# Altium PCB PCB1.PcbDoc
Units mil, origin at the board's own origin, x right, y up, seen from the top; angles counter-clockwise.
Board outline 8725 x 6365 mil, 2 copper layers (Top Layer, Bottom Layer); 35 components, 52 nets, 174 pads, 4 vias.
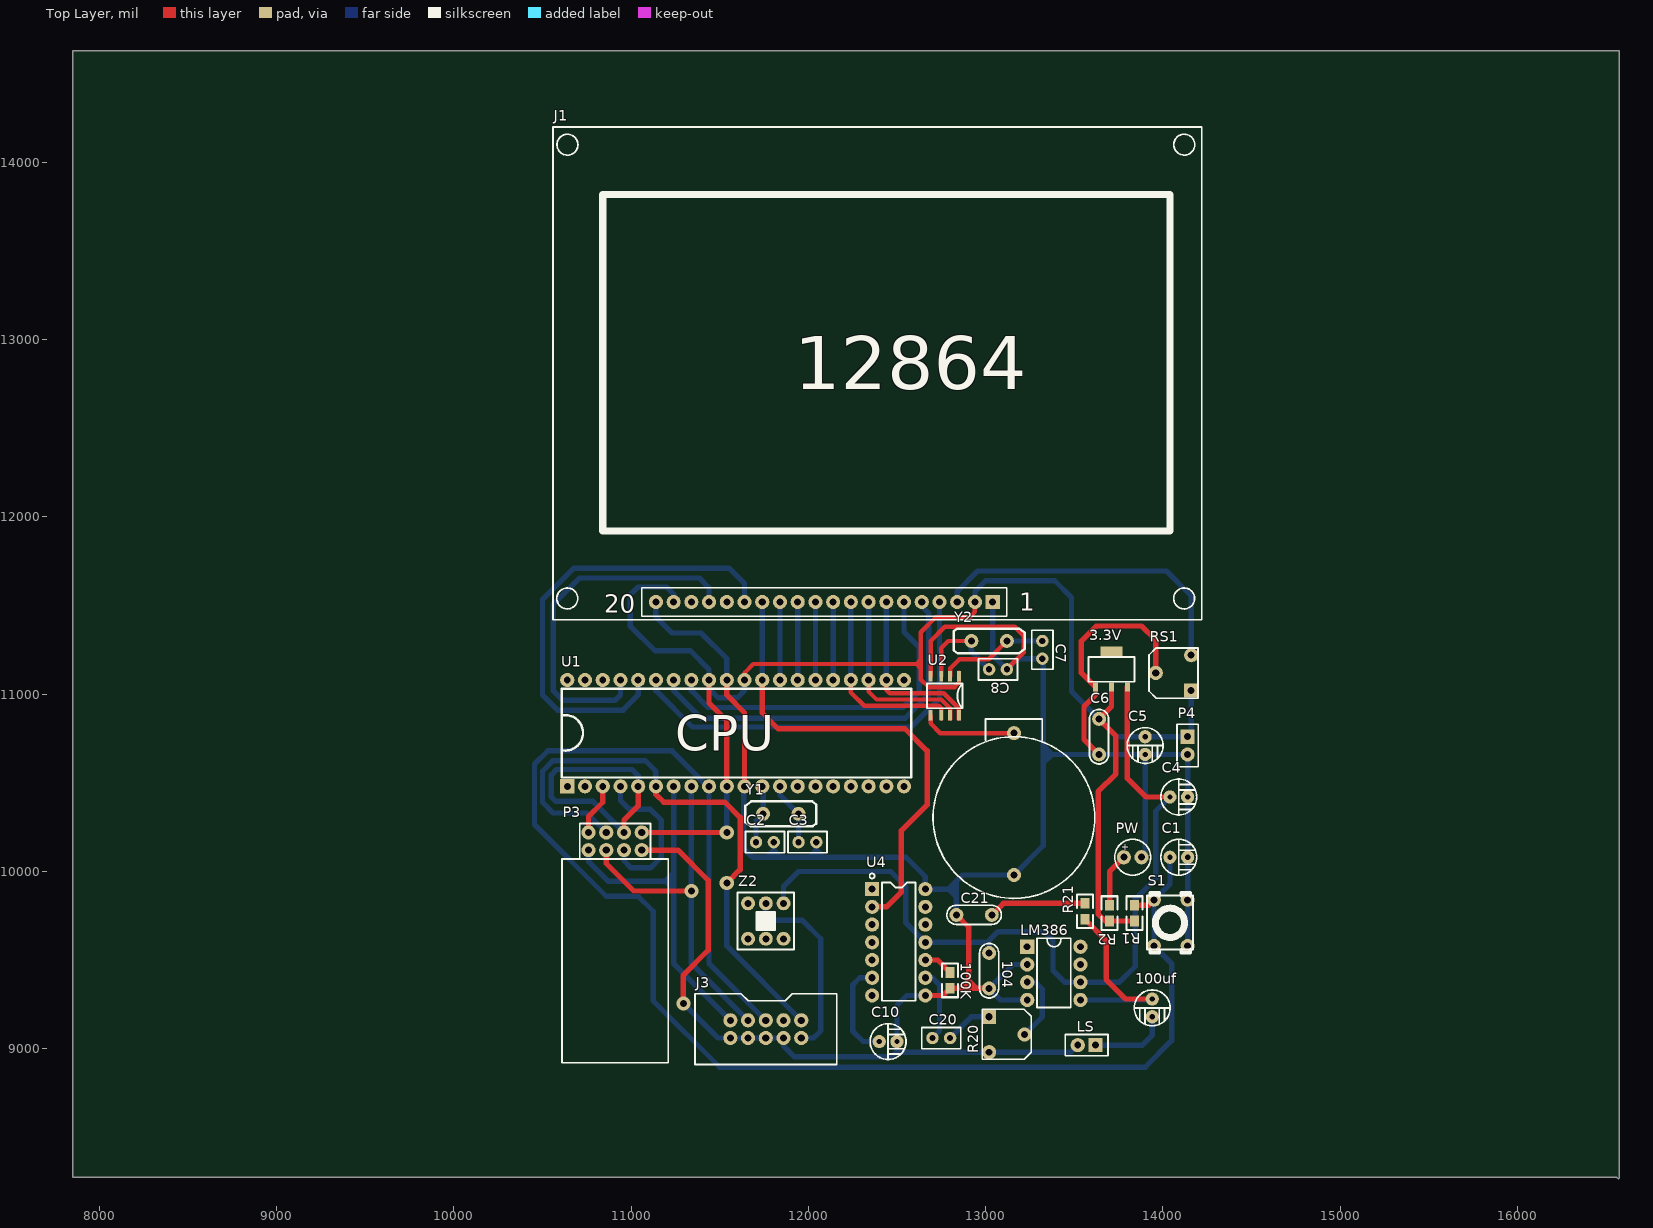
[diagram p0: Top Layer view]
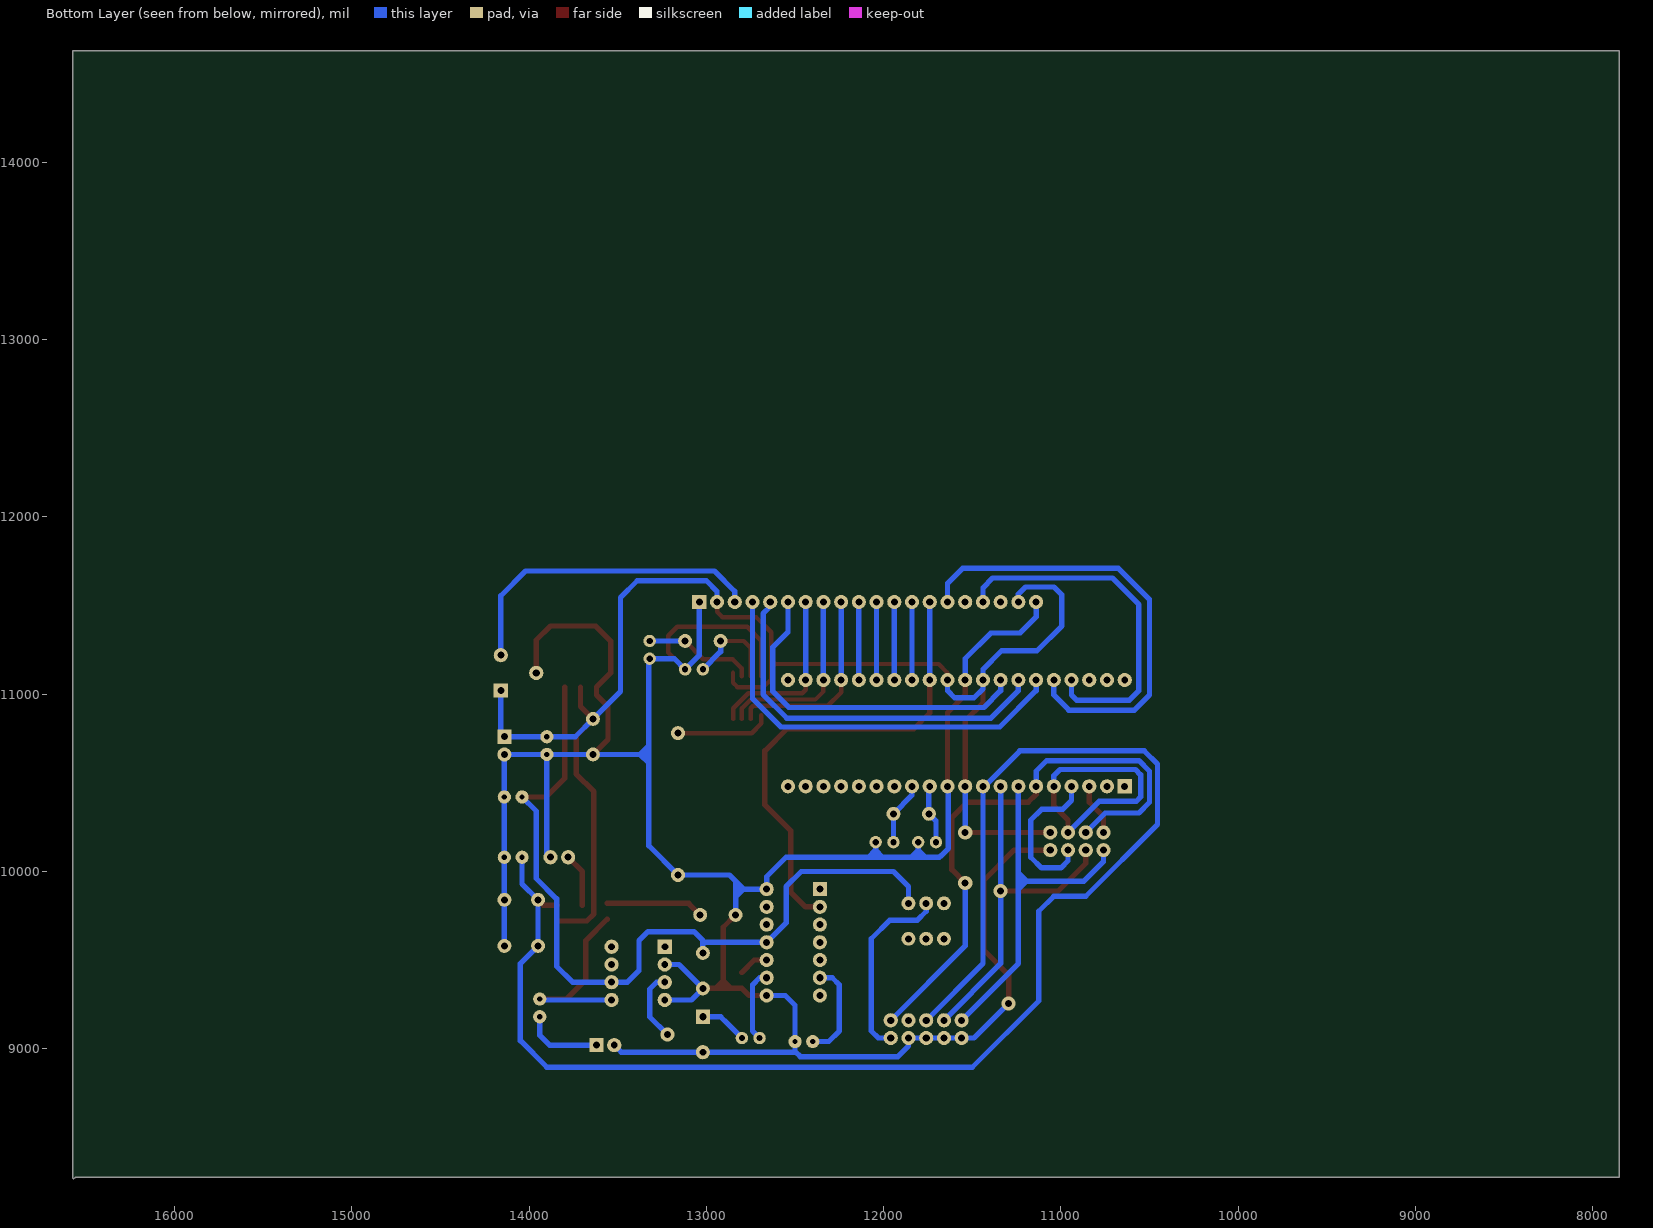
[diagram p1: Bottom Layer view, seen from below]

## Layer stack, top to bottom
Top Solder: solder mask 0.4, Solder Resist, Dk 3.5
Top Layer: signal copper 1.4
Dielectric1: dielectric 12.6, FR-4, Dk 4.8
Bottom Layer: signal copper 1.4
Bottom Solder: solder mask 0.4, Solder Resist, Dk 3.5

## Board outline
7850,14630 16575,14630 16575,8270 16570,8265 16560,8275 7850,8275 7850,14630

## Design rules (kind name [scope] priority, off if disabled: settings)
Clearance [All] p1: gap=10
PolygonConnect [All] p1: connectstyle=Relief reliefconductorwidth=10 reliefentries=4 polygonreliefangle="90 Angle" airgapwidth=10
RoutingVias [All] p1: holewidth=28 width=50 viastyle="Through Hole" minholewidth=28 minwidth=50 maxholewidth=28 maxwidth=50
SilkToSolderMaskClearance SilkscreenOverComponentPads [IsPad] p1: minsilkscreentomaskgap=10 clearancetoexposedcopper=TRUE
SolderMaskExpansion [All] p1: expansion=4
UnpouredPolygon [All] p1: allowunpoured=FALSE
Width [All] p1: maxlimit=30 minlimit=10 preferedwidth=30 minimp=50.000000 maximp=50.000000 favimp=50.000000
28 further rules are at their usual default settings.

## Components (designator, comment, footprint, x,y, rotation, side; value= is the part's Value field where it differs from the comment)
3.3V "ASM1117" "AMS1117-3.3V  SOT-223  贴片" 13620,11040 r0 top (schematic designator 1117_3.3V)
100K "Res1" 0805 12800,9340 r90 top (schematic designator R?)
100uf "" 电容 13940,9280 r270 top
104 "Cap" 电容涤纶223 13020,9340 r90 top (schematic designator C?)
C1 "" 电容 14040,10080 r0 top
C2 "" 电容22pF 11805,10165 r180 top
C3 "" 电容22pF 12045,10165 r180 top
C4 "" 电容 14040,10420 r0 top
C5 "" 电容 13900,10760 r270 top
C6 "Cap" 电容涤纶223 13640,10860 r270 top
C7 "Cap" 电容22pF 13320,11200 r90 top
C8 "Cap" 电容22pF 13120,11140 r180 top
C10 "Cap Pol1" 电容 12400,9040 r0 top
C20 "" 电容22pF 12700,9060 r0 top
C21 "" 电容CBB224(0.22) 12835,9755 r0 top
J1 "12864（排母）" 12864 13040,11520 r0 top
J3 "牛角座" 下载口（12345） 11960,9160 r180 top
LM386 "" "DIP 8" 13235,9575 r270 top
LS "喇叭8Ω" 2排针 13620,9020 r180 top (schematic designator LS?)
P3 "无线——排母" 无线模块 11060,10120 r180 top
P4 "Header 2" 2排针 14140,10760 r270 top
PW "" LED 13780,10080 r0 top
R1 "" 0805 13840,9720 r90 top
R2 "" 0805 13700,9720 r90 top
R20 "10K" 小电位器 13020,9180 r0 top
R21 "" 0805 13560,9820 r270 top
RS1 "" 小电位器 14160,11020 r180 top
S1 "" 4脚按键 13940,9580 r0 top
U1 "ATmega16" "DIP 40 单片机" 10640,10480 r0 top
U2 "DS1302（贴片）" SOP8（DS1302） 12860,10860 r270 top
U4 "ISD1820" 14脚IC 12360,9900 r270 top
Y1 "8M" 晶振 11945,10325 r180 top
Y2 "32.768" 晶振 12920,11300 r0 top
Z2 "电源开关" 自锁开关 11860,9820 r270 top
? "纽扣电池" 电池座 13160,10780 r90 top

## Footprints (in the part's own frame and the unit in brackets; to place one, negate y for a bottom-side part, rotate by r counter-clockwise, add the part's x,y. Pads: shape width x height; smd on the part's side, far side on the other; paste and mask are expansions set on the pad)
2排针 [mil]
  rect 80x80 hole 39.37: 1(0,0)
  round 80 hole 39.37: 2(100,0)
  silkscreen extent -70,-60 170,60
4脚按键 [mm]
  round 2 hole 1: 1(0.254,0) 1(0.254,6.604) 2(5.08,0) 2(5.08,6.604)
  silkscreen extent -0.76,-1.02 5.84,7.62
14脚IC [mil]
  rect 80x80 hole 40: 1(0,0)
  round 80 hole 40: 2(100,0) 3(200,0) 4(300,0) 5(400,0) 6(500,0) 7(600,0) 8(600,300) 9(500,300) 10(400,300) 11(300,300) 12(200,300) 13(100,300) 14(0,300)
  silkscreen extent -88,-14 630,245
0805 [mil]
  rect 60x50 smd: 1(0,0) 2(90,0)
  silkscreen extent -50,-45 140,45
12864 [mil]
  rect 80x80 hole 40: 1(0,0)
  round 80 hole 40: 2(-100,0) 3(-200,0) 4(-300,0) 5(-400,0) 6(-500,0) 7(-600,0) 8(-700,0) 9(-800,0) 10(-900,0) 11(-1000,0) 12(-1100,0) 13(-1200,0) 14(-1300,0) 15(-1400,0) 16(-1500,0) 17(-1600,0) 18(-1700,0) 19(-1800,0) 20(-1900,0)
  silkscreen extent -2480,-100 1180,2680
"AMS1117-3.3V  SOT-223  贴片" [mm]
  rect 0.7x1.3 smd: 1(0,0) 2(2.286,0) 3(4.572,0)
  rect 3.2x1.5 smd: ""(2.286,5.08)
  silkscreen extent -1.02,0.76 5.59,4.32
"DIP 8" [mil]
  rect 80x80 hole 39.37: 1(0,0)
  round 80 hole 39: 2(100,0) 3(200,0) 4(300,0) 5(300,300) 6(200,300) 7(100,300) 8(0,300)
  silkscreen extent -48,55 342,245
"DIP 40 单片机" [mil]
  rect 80x80 hole 39.37: 1(0,0)
  round 80 hole 39: 2(100,0) 3(200,0) 4(300,0) 5(400,0) 6(500,0) 7(600,0) 8(700,0) 9(800,0) 10(900,0) 11(1000,0) 12(1100,0) 13(1200,0) 14(1300,0) 15(1400,0) 16(1500,0) 17(1600,0) 18(1700,0) 19(1800,0) 20(1900,0) 21(1900,600) 22(1800,600) 23(1700,600) 24(1600,600) 25(1500,600) 26(1400,600) 27(1300,600) 28(1200,600) 29(1100,600) 30(1000,600) 31(900,600) 32(800,600) 33(700,600) 34(600,600) 35(500,600) 36(400,600) 37(300,600) 38(200,600) 39(100,600) 40(0,600)
  silkscreen extent -31,50 1940,550
LED [mil]
  round 80 hole 39.37: 1(0,0) 2(100,0)
  silkscreen extent -51,-101 151,101
SOP8（DS1302） [mil]
  rect 59.06x21.65 smd: 1(-240,-10) 2(-240,-60) 3(-240,-110) 4(-240,-170) 5(-20,-10) 6(-20,-60) 7(-20,-110) 8(-20,-170)
  silkscreen extent -200,-190 -60,10
下载口（12345） [mil]
  round 80 hole 40: 1(0,0) 2(100,0) 3(200,0) 4(300,0) 5(400,0) 6(0,100) 7(100,100) 8(200,100) 9(300,100) 10(400,100)
  silkscreen extent -200,-150 600,250
小电位器 [mil]
  rect 80x80 hole 40: 1(0,0)
  round 80 hole 40: 2(200,-100)
  round 80 hole 39: 3(0,-200)
  silkscreen extent -39,-240 238,43
无线模块 [mil]
  round 80 hole 40: 1(0,0) 2(0,-100) 3(100,0) 4(100,-100) 5(200,0) 6(200,-100) 7(300,0) 8(300,-100)
  silkscreen extent -150,-150 450,1200
晶振 [mm]
  round 2 hole 1: 1(0,0) 2(5.08,0)
  silkscreen extent -2.54,-1.78 7.62,1.78
电容 [mm]
  round 1.9 hole 0.762: 1(0,0) 2(2.54,0)
  silkscreen extent -1.3,-2.57 3.84,2.57
电容22pF [mil]
  round 70 hole 35: 1(0,0) 2(100,0)
  silkscreen extent -60,-60 160,60
电容CBB224(0.22) [mm]
  round 2 hole 1: 1(0,0) 2(5.08,0)
  silkscreen extent -1.37,-1.37 6.45,1.37
电容涤纶223 [mm]
  round 2 hole 1: 1(0,0) 2(5.08,0)
  silkscreen extent -1.37,-1.37 6.45,1.37
电池座 [mil]
  round 80 hole 39: 1(0,0) 2(-800,0)
  silkscreen extent -932,-456 80,456
自锁开关 [mm]
  round 2 hole 1: 1(0,-5.08) 2(0,-2.54) 3(0,0) 4(5.08,0) 5(5.08,-2.54) 6(5.08,-5.08)
  silkscreen extent -1.55,-6.6 6.6,1.5

## Part data
3.3V 100uf: library part Component_1
100K: "Resistor"
104 C6 C7 C8: "Capacitor"
C1 C4 C5: library part "Cap Pol3", "Polarized Capacitor (Surface Mount)"
C2 C3 C20 C21: library part Cap, "Capacitor"
C10: "Polarized Capacitor (Radial)"
J1: library part "Header 20", "Header, 20-Pin"
J3: library part "Header 5X2A", "Header, 5-Pin, Dual row"
LM386: library part LM386
LS: library part Speaker, "Loudspeaker"
P3: library part "Header 4X2", "Header, 4-Pin, Dual row"
P4: "Header, 2-Pin"
PW: library part LED0, "Typical INFRARED GaAs LED"
R1 R2 R21: library part Res2, "Resistor"
R20: library part "RPot SM", "Square Trimming Potentiometer"
RS1: library part RPot, "Potentiometer"
S1: library part SW-PB, "Switch"
U1: library part Component_2
U2: library part DS1302, "Trickle Charge Timekeeping Chip"
U4: library part ISD1810
Y1 Y2: library part XTAL, "Crystal Oscillator"
Z2: library part SW-SPDT, "SPDT Subminiature Toggle Switch, Right Angle Mounting, Vertical Actuation"
?: library part Meter, "Indicating Instrument"

## Via types
v1: diameter 80, hole 40, Top Layer to Bottom Layer, 4 vias

## Nets (pads, with @x,y where several pads share a name; then routed paths per layer and width w, separated by ;. In a path a pad name is that pad's centre, name@x,y a point inside that pad or via, vN(x,y) a via of type N, cw(c..) or ccw(c..) an arc to the next point about the centre after c; other vN are vias at no path point)
3.3V: 3.3V.2 C5.1 C6.1 J1.2 J1.19 P3.2 P4.1 R1.1 R2.1 RS1.1 U1.10 U1.30 U1.32 U2.1 | length 8756.2
  Top Layer w25: U1.30 11640,11120 11690,11170 12610,11170 ; U2.1@12850,11120 12850,11065 12825,11040 12677.83,11040 12635,11082.83 12635,11145 ; J1.2 12940,11465 12910,11435 12720,11435 12635,11350 12635,11195 ; 12610,11170 12635,11145 ; 12610,11170 12635,11195 ; 12635,11145 12635,11195
  Top Layer w30: P3.2 v1(11540,10220) ; U1.32 11440,10950 11540,10850 U1.10 ; 3.3V.2 13710,10930 C6.1 13735,10765 13735,10550 13635,10450 13635,9760 13675,9720 R2.1 R1.1
  Bottom Layer w30: J1.19@11220,11520 J1.19@11245,11495 ; J1.19 11240,11565 11200,11605 11040,11605 10995,11560 10995,11385 11135,11245 11335,11245 11440,11140 U1.32 11440,11030 11490,10980 11600,10980 11640,11020 U1.30 ; v1(11540,10220) U1.10 ; J1.2 12940,11580 13000,11640 13390,11640 13485,11545 13485,11015 C6.1 13740,10760 C5.1 P4.1 ; P4.1@14160,10780 RS1.1
CE: P3.3 U1.4 | length 877
  Bottom Layer w30: U1.4 10940,10400 10990,10350 11110,10350 11170,10290 11170,10080 11110,10020 11000,10020 10960,10060 P3.3
CSN: P3.4 U1.5 | length 1487.9
  Top Layer w30: P3.4 10960,10290 11040,10370 U1.5
  Bottom Layer w30: P3.4 10785,10395 10760,10395 10575,10395 10550,10420 10550,10545 10580,10575 11005,10575 11040,10540 U1.5
GND: 3.3V.1 100K.1 104.1 ?.2 C1.2 C2.1 C3.1 C4.2 C5.2 C6.2 C7.1 C8.1 C10.2 C21.1 J1.1 J1.20 J3.7 J3.8 J3.9 J3.10 LM386.2 LM386.4 LS.2 P3.1 P4.2 PW.2 R20.3 RS1.2 S1.2 U1.11 U1.31 U2.4 U4.8 U4.14 | length 16597.4
  Top Layer w25: U2.4 12690,11300 12770,11380 13165,11380 13215,11330 13215,11235 C8.1
  Top Layer w30: P3.1 11265,10120 11435,9950 11435,9555 11295,9415 v1(11295,9255) ; U1.31 11540,10995 11640,10895 U1.11 ; U4.8 12760,9300 100K.1 12860,9340 ; C21.1 12905,9685 12905,9385 ; 12955,9340 12950,9340 ; 104.1 12950,9340 ; C6.2 13555,10745 13555,10930 13620,10995 3.3V.1 13540,11120 13540,11300 13625,11385 13880,11385 13960,11305 RS1.2 ; 12860,9340 12905,9385 ; 12860,9340 12905,9340 ; 12905,9340 12950,9340 ; 12905,9340 12905,9385 ; 12905,9385 12950,9340
  Bottom Layer w30: J1.20 11140,11435 11230,11345 11395,11345 11540,11200 U1.31 ; v1(11295,9255) 11490,9060 J3.10 J3.9 J3.8 J3.7 11860,9015 11920,8955 12470,8955 12500,8985 ; U1.11@11635,10480 11635,10130 11680,10085 ; U1.11@11640,10455 U1.11 ; 11685,10080 11765,10080 ; C2.1 11805,10120 ; C3.1 12045,10120 ; U4.8 12555,9300 12500,9245 12500,8980 R20.3 13480,8980 LS.2 ; C21.1 12835,9855 ; J1.1 13040,11220 C8.1 ; C8.1@13125,11135 C8.1 ; LM386.4 13085,9275 104.1 13155,9475 LM386.2 ; PW.2 13900,10100 C5.2 ; S1.2@14140,9580 14140,9840 C1.2 C4.2 P4.2 C5.2 ; 11765,10080 11805,10080 ; 11765,10080 11805,10120 ; 11805,10080 11845,10080 ; 11805,10080 11805,10120 ; 11805,10120 11845,10080 ; 11845,10080 12005,10080 ; 12005,10080 12045,10080 ; 12005,10080 12045,10120 ; 12045,10080 12085,10080 ; 12045,10080 12045,10120 ; 12045,10120 12085,10080 ; 12085,10080 12550,10080 12660,9970 U4.14 12790,9900 ; 12790,9900 12835,9855 ; 12790,9900 12835,9900 ; 12790,9900 12835,9945 ; 12835,9855 12835,9900 ; 12835,9900 12835,9945 ; 12835,9945 12870,9980 ?.2 13325,10145 13325,10610 ; C8.1 13180,11200 13325,11200 13325,10710 ; 13325,10610 13325,10660 ; 13325,10610 13375,10660 ; 13325,10660 13375,10660 ; 13325,10660 13325,10710 ; 13325,10710 13375,10660 ; 13375,10660 C6.2 C5.2
IRQ: P3.8 U1.3 | length 293.1
  Top Layer w30: P3.8 10760,10310 10840,10390 U1.3
MISO: J3.5 P3.7 U1.7 | length 2170.4
  Bottom Layer w30: P3.7 10760,10055 10870,9945 11195,9945 ; U1.7 11240,9990 ; J3.5 11240,9480 11240,9900 ; 11195,9945 11240,9900 ; 11195,9945 11240,9945 ; 11195,9945 11240,9990 ; 11240,9900 11240,9945 ; 11240,9945 11240,9990
MOSI: J3.1 P3.6 U1.6 | length 3304
  Top Layer w30: U1.6 11140,10435 11185,10390 11530,10390 11615,10305 11615,10010 v1(11540,9935)
  Bottom Layer w30: P3.6 10750,10330 10560,10330 10500,10390 10500,10565 10560,10625 11080,10625 11140,10565 U1.6 ; v1(11540,9935) 11540,9580 J3.1
Net100uf_1: 100uf.1 LM386.5 R21.2 | length 1095.3
  Top Layer w30: R21.2 13680,9610 13680,9390 13790,9280 100uf.1
  Bottom Layer w30: LM386.5 100uf.1@13935,9275
Net100uf_2: 100uf.2 LS.1 | length 447.8
  Bottom Layer w30: LS.1 13885,9020 13902.5,9037.5 13940,9075 100uf.2
Net_1: ?.1 U2.8 | length 537.8
  Top Layer w25: U2.8 12690,10835 12745,10780 ?.1
NetC7_2: C7.2 U2.2 Y2.2 | length 629.2
  Top Layer w25: U2.2 12800,11145 12852.5,11197.5 13017.5,11197.5 Y2.2
  Bottom Layer w30: Y2.2 C7.2
NetC8_2: C8.2 U2.3 Y2.1 | length 548
  Top Layer w25: U2.3 12750,11260 12790,11300 Y2.1
  Bottom Layer w30: Y2.1 12920,11240 C8.2
NetC10_1: C10.1 U4.6 | length 561.4
  Bottom Layer w30: U4.6 12290,9400 12250,9360 12250,9100 12310,9040 C10.1
NetC20_1: C20.1 U4.9 | length 413.1
  Bottom Layer w30: U4.9 12700,9400 12740,9360 12740,9100 C20.1
NetC20_2: C20.2 R20.1 | length 269.7
  Bottom Layer w30: C20.2 12885,9145 12920,9180 R20.1
NetC21_2: C21.2 R21.1 | length 551.9
  Top Layer w30: C21.2 13100,9820 13170,9820 R21.1
NetJ3_6: J3.6 Z2.2 | length 1065.8
  Bottom Layer w30: Z2.2 11760,9775 11810,9725 11965,9725 12070,9620 12070,9100 12030,9060 J3.6
NetLM386_3: LM386.3 R20.2 | length 398
  Bottom Layer w30: R20.2 13320,9180 13320,9335 13280,9375 LM386.3
NetPW_1: PW.1 R2.2 | length 303.1
  Top Layer w30: R2.2 13700,10000 PW.1
NetR?_2: 100K.2 U4.10 | length 169
  Top Layer w30: U4.10 12730,9500 100K.2
PA0: U1.40
PA1: U1.39
PA2: U1.38
PA3: J1.17 U1.37 | length 2030.1
  Bottom Layer w30: U1.37 10940,10995 10910,10965 10615,10965 10560,11020 10560,11505 10710,11655 11385,11655 11440,11600 J1.17
PA4: J1.15 U1.36 | length 2588.1
  Bottom Layer w30: U1.36 11040,10995 10955,10910 10585,10910 10500,10995 10500,11535 10675,11710 11555,11710 11640,11625 J1.15
PA5: J1.4 U1.35 | length 2356.2
  Bottom Layer w30: U1.35 11140,11020 11345,10815 12580,10815 12740,10975 J1.4
PA6: J1.5 U1.34 | length 2157.6
  Bottom Layer w30: U1.34 11240,11020 11395,10865 12546.57,10865 12680,10998.43 12680,11455 12640,11495 J1.5
PA7: J1.6 U1.33 | length 1961.8
  Bottom Layer w30: U1.33 11340,11020 11435,10925 12535,10925 12625,11015 12625,11265 12540,11350 J1.6
PB0: U1.1
PB1: U1.2
PB7: J3.4 P3.5 U1.8 | length 2071.8
  Top Layer w30: P3.5 10860,10045 11015,9890 v1(11340,9890)
  Bottom Layer w30: U1.8 11340,9480 J3.4
PC0: J1.7 U1.22 U2.5 | length 1007.3
  Top Layer w25: U1.22 12440,11025 12460,11005 12763.99,11005 12848.49,10920.5 U2.5@12848.49,10860
  Bottom Layer w30: U1.22 J1.7
PC1: J1.8 U1.23 U2.6 | length 1063.8
  Top Layer w25: U1.23 12340,11015 12385,10970 12749.5,10970 12799.5,10920 U2.6@12799.5,10860
  Bottom Layer w30: U1.23 J1.8
PC2: J1.9 U1.24 U2.7 | length 1117.3
  Top Layer w25: U1.24 12240,11010 12315,10935 12735,10935 12750,10920 U2.7@12750,10860
  Bottom Layer w30: U1.24 J1.9
PC3: J1.10 U1.25 | length 440
  Bottom Layer w30: U1.25 J1.10
PC4: J1.11 U1.26 | length 440
  Bottom Layer w30: U1.26 J1.11
PC5: J1.12 U1.27 | length 440
  Bottom Layer w30: U1.27 J1.12
PC6: J1.13 U1.28 | length 440
  Bottom Layer w30: U1.28 J1.13
PC7: J1.14 U1.29 U4.2 | length 2699.3
  Top Layer w30: U1.29 11740,10970 11740,10895 11830,10805 12545,10805 12670,10680 12670,10375 12525,10230 12525,9885 12440,9800 U4.2
  Bottom Layer w30: U1.29 J1.14
PD0: U1.14
PD1: U1.15
PD2: U1.16
PD3: U1.17
PD4: U1.18
PD5: U1.19
PD6: U1.20
PD7: U1.21
RES: C1.1 J3.3 R1.2 S1.1 U1.9 | length 8648
  Top Layer w30: R1.2 13920,9810 S1.1@13950,9840
  Bottom Layer w30: J3.3 11440,9480 U1.9 11431.92,10480 11231.92,10680 10530,10680 10455,10605 10455,10265 10860,9860 11040,9860 11125,9775 11125,9270 11500,8895 13900,8895 14050,9045 14050,9480 13950,9580 13950,9840 14040,9930 C1.1
VCC: 3.3V.3 104.2 C4.1 LM386.6 U4.11 Z2.3 | length 4598.5
  Top Layer w30: 3.3V.3 13800,10525 13905,10420 C4.1
  Bottom Layer w30: Z2.3 11860,9915 11945,10000 12465,10000 12550,9915 12550,9710 U4.11 13020,9600 ; 104.2@13007.5,9552.5 104.2 13020,9600 ; C4.1 13960,10340 13960,9960 13845,9845 13845,9465 13755,9375 LM386.6 13445,9375 13380,9440 13380,9610 13330,9660 13070,9660 13020,9610 13020,9600
VO: J1.3 RS1.3 | length 1820.6
  Bottom Layer w30: J1.3 12840,11580 12955,11695 14020,11695 14160,11555 RS1.3
XTAL1: C3.2 U1.13 Y1.1 | length 358.5
  Bottom Layer w30: U1.13 11840,10430 Y1.1 C3.2
XTAL2: C2.2 U1.12 Y1.2 | length 326.6
  Bottom Layer w30: C2.2 11705,10285 Y1.2 U1.12@11745,10475
pads on no net: 3.3V. J1.16 J1.18 J3.2 LM386.1 LM386.7 LM386.8 U4.1 U4.3 U4.4 U4.5 U4.7 U4.12 U4.13 Z2.1 Z2.4 Z2.5 Z2.6

## Text inside footprints (layer, text, board x,y; h text height)
J1: Top Overlay "12864" at 11920,12720 h300; Top Overlay "1" at 13190,11470 h100; Top Overlay "20" at 10850,11460 h100
PW: Top Overlay "+" at 13765,10120 h39.37
U1: Top Overlay "CPU" at 11250,10680 h200